# Altium PCB hotswap_pcb.PcbDoc
Units mm, origin at the board's own origin, x right, y up, seen from the top; angles counter-clockwise.
Board outline 68.71 x 34.54 mm, 4 copper layers (Top Layer 1, Logic, Bottom Layer, PWR Layer), stack 0.672 mm thick; 15 components, 13 nets, 42 pads, 6 vias.
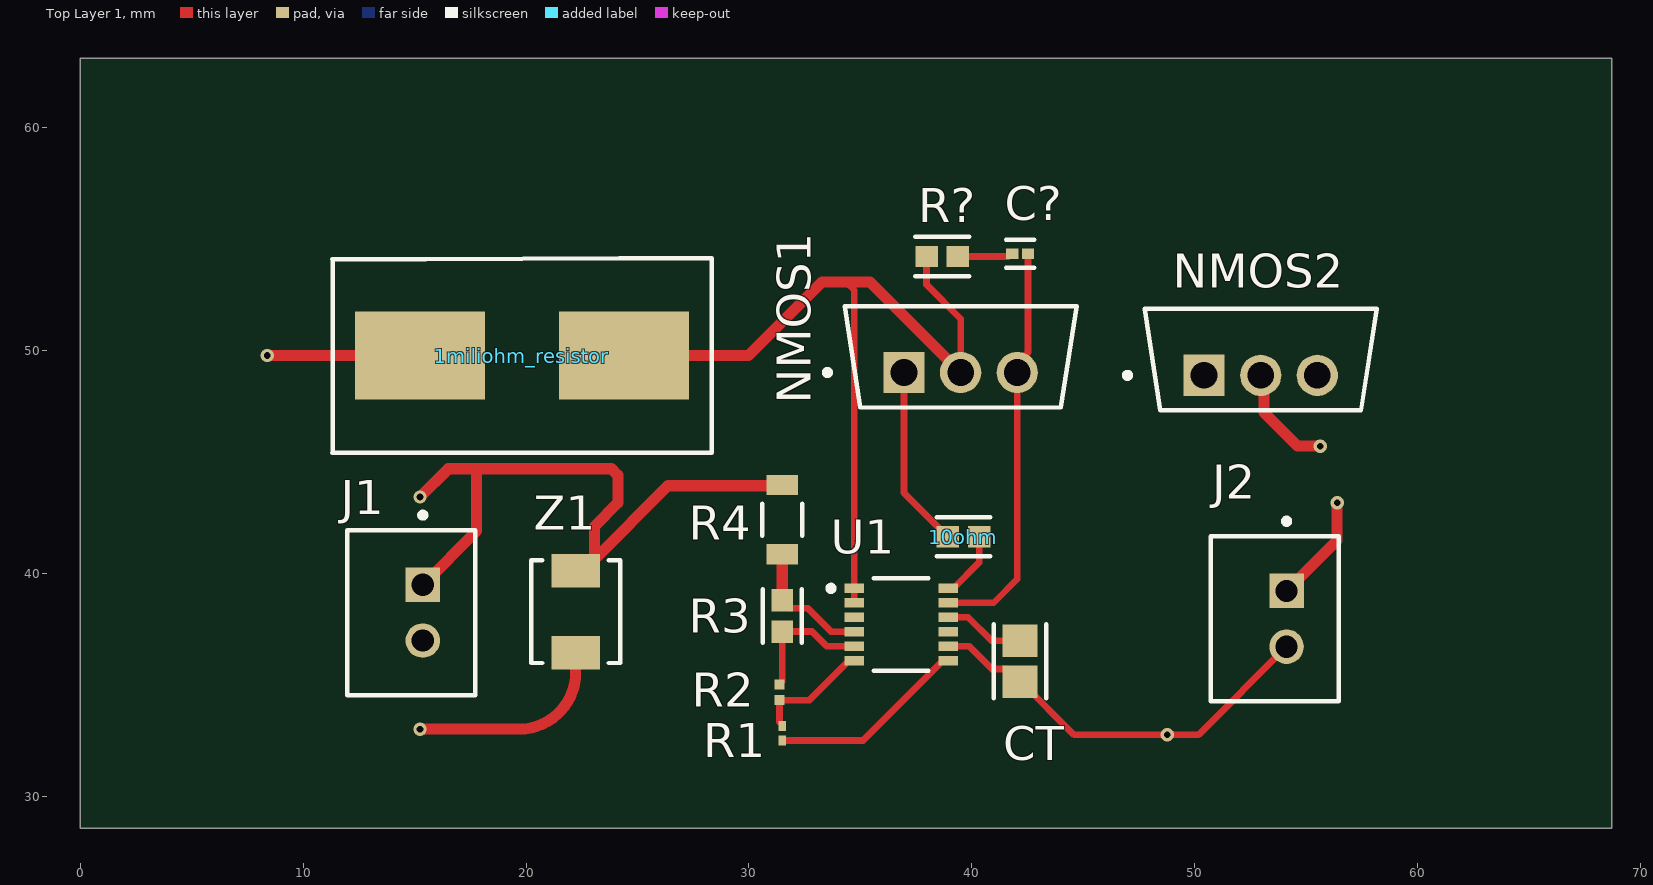
[diagram p0: Top Layer 1 view]
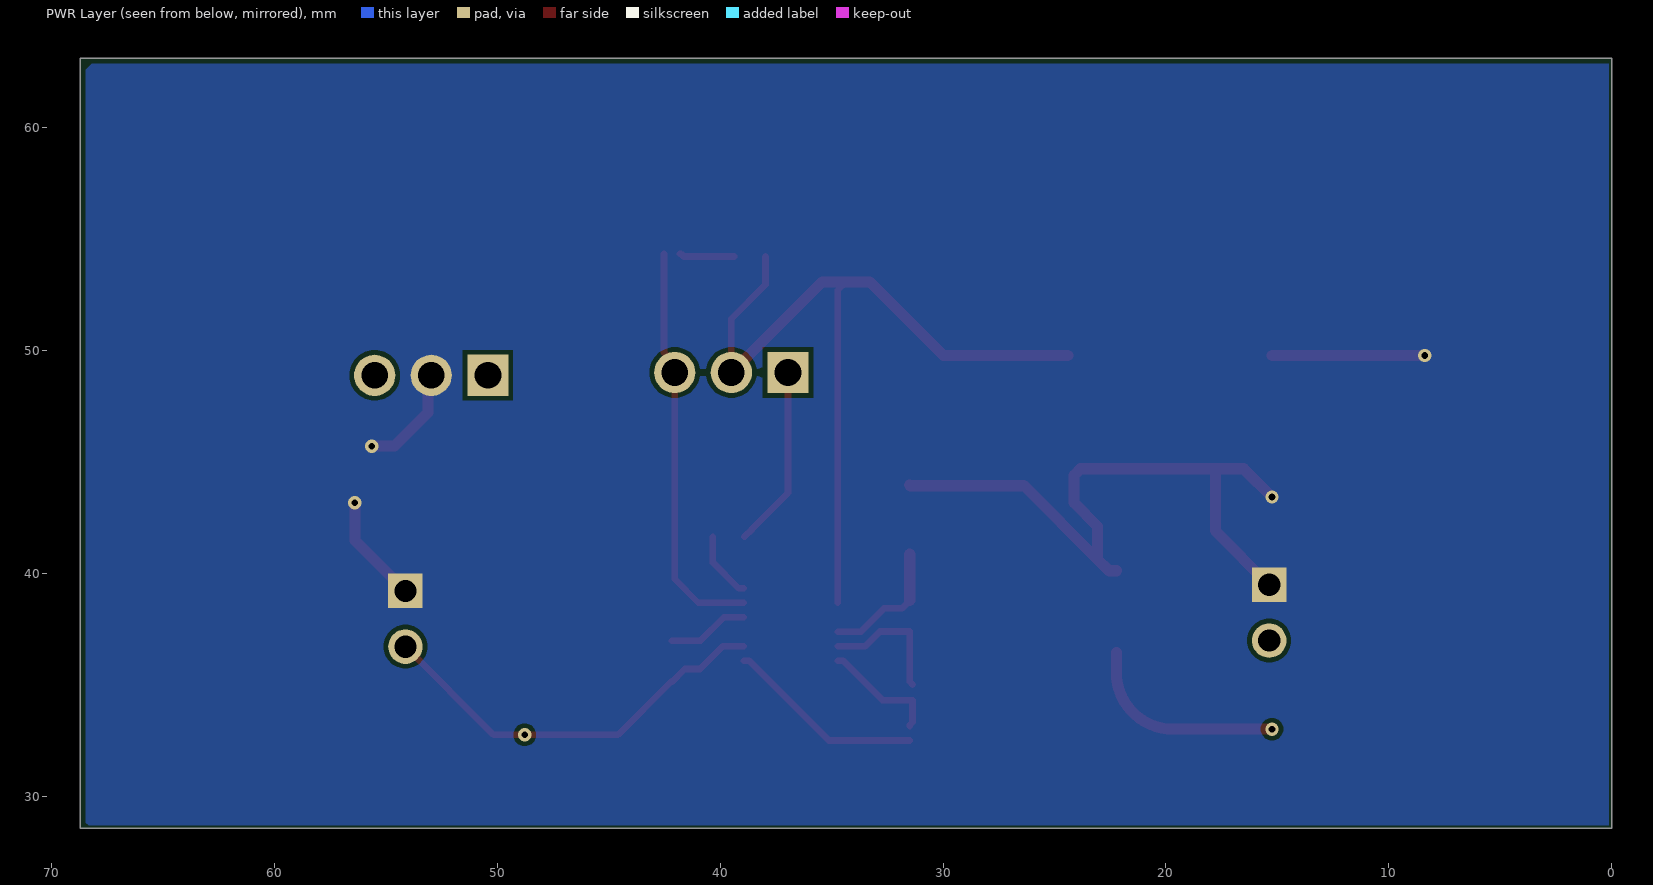
[diagram p1: PWR Layer view, seen from below]
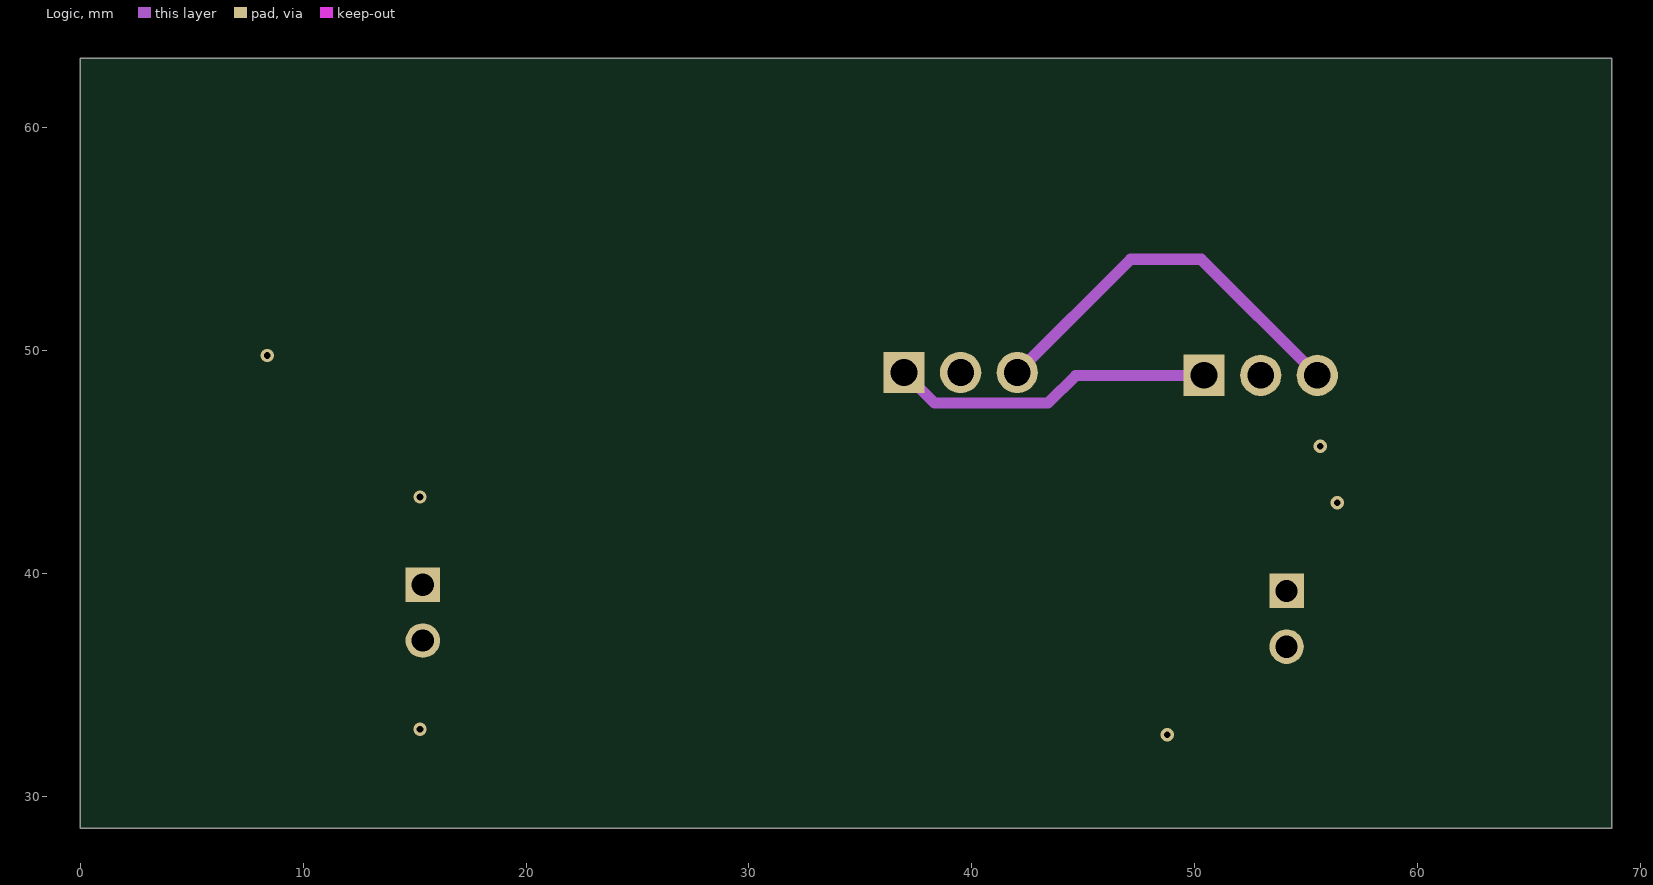
[diagram p2: Logic]
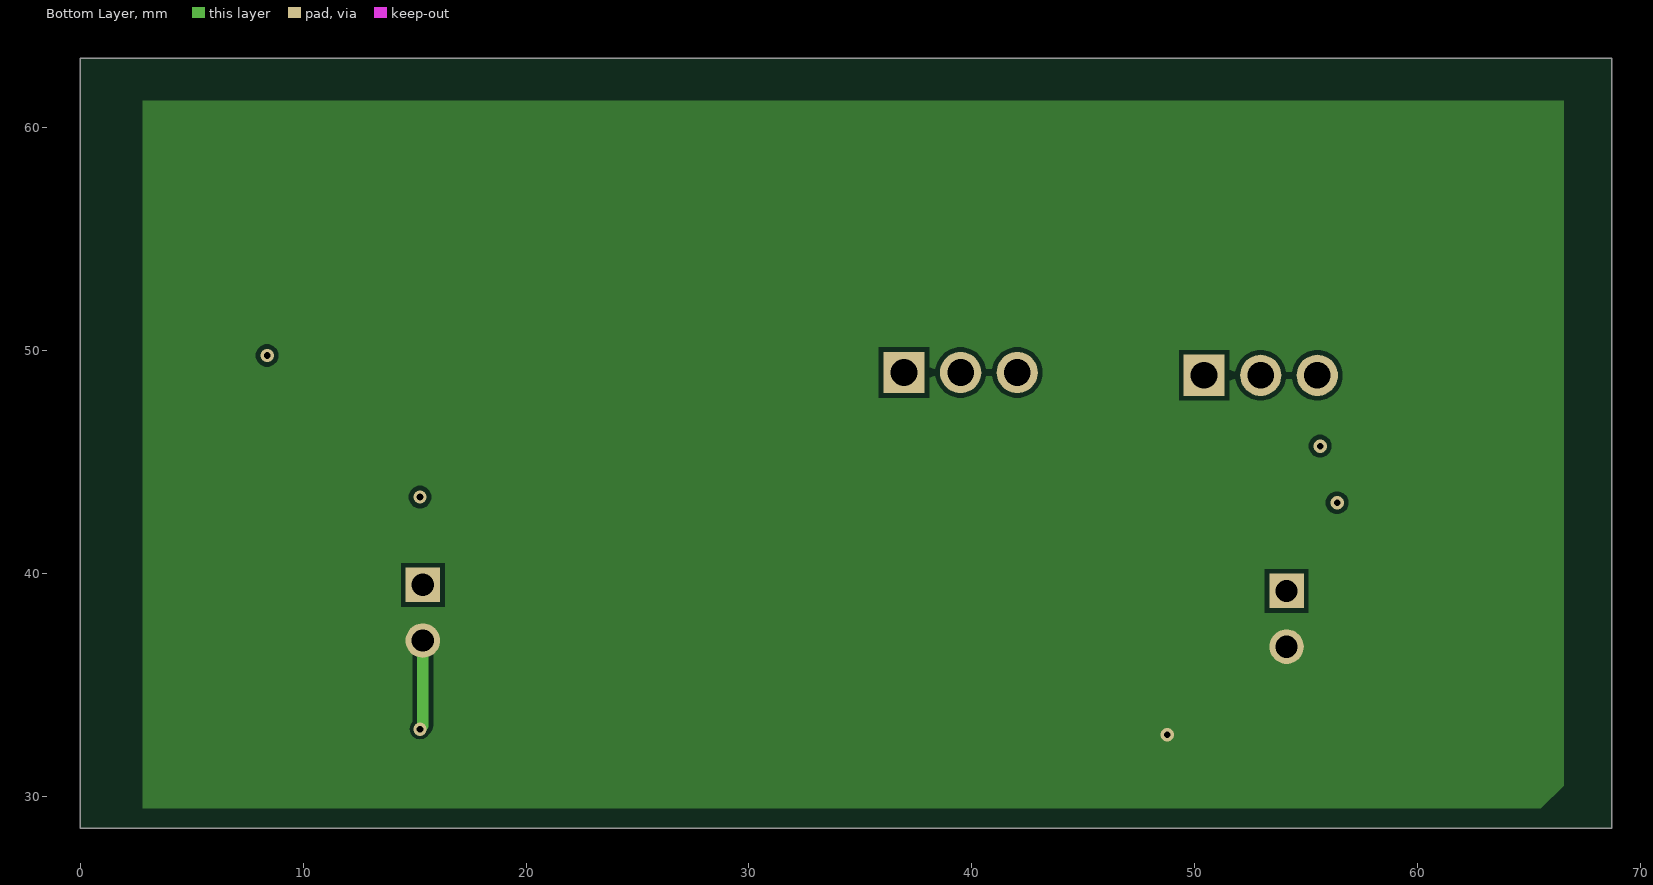
[diagram p3: Bottom Layer]
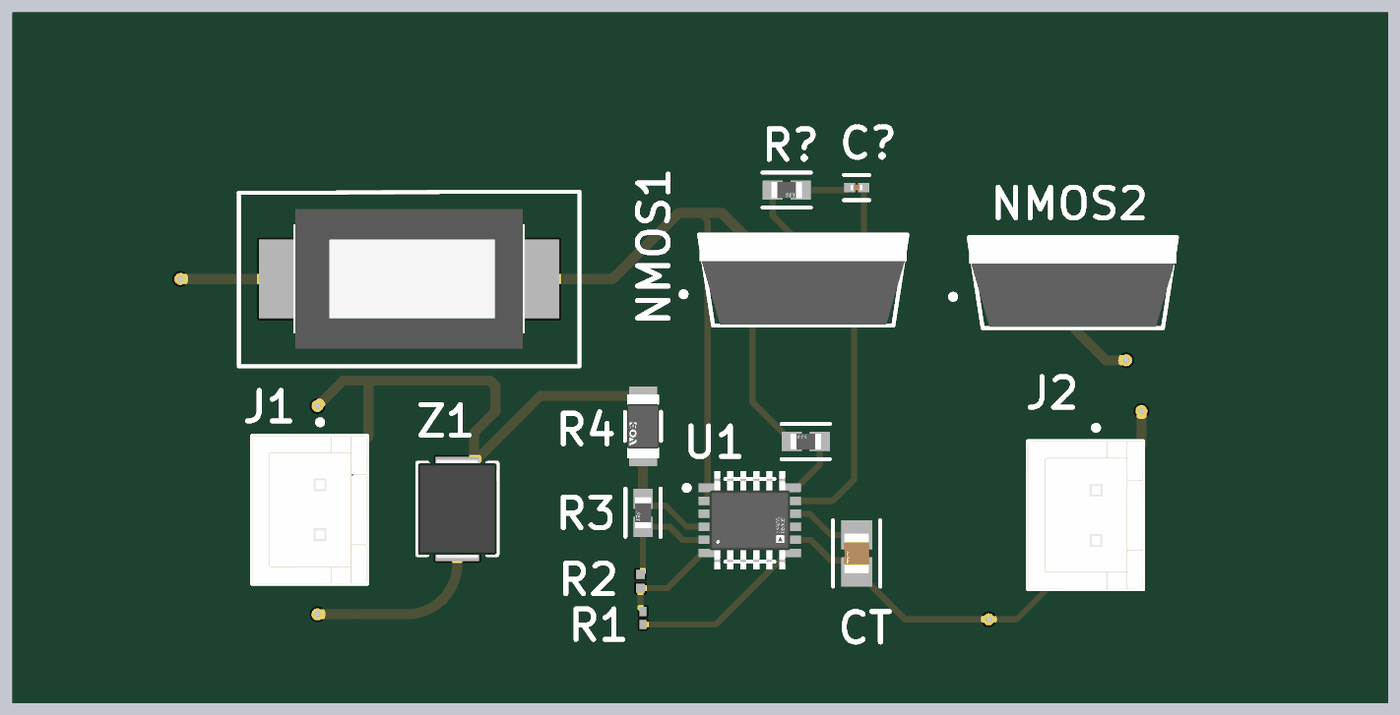
[diagram p4: 3D render of the assembled board from above, using the file's embedded part models]

## Layer stack, top to bottom
Top Solder: solder mask 0.0102, Solder Resist, Dk 3.5
Top Layer 1: signal copper 0.07
Dielectric 2: prepreg 0.0711, PP-006, Dk 4.1
Logic: signal copper 0.035
Dielectric 1: dielectric 0.32, FR-4, Dk 4.8
Bottom Layer: signal copper 0.035
Dielectric 3: prepreg 0.0711, PP-006, Dk 4.1
PWR Layer: signal copper 0.07
Bottom Solder: solder mask 0.0102, Solder Resist, Dk 3.5

## Board outline
0,28.575 68.707,28.575 68.707,63.119 0,63.119

## Design rules (kind name [scope] priority, off if disabled: settings)
Clearance [All] p1: gap=0.2 ignorepadtopadclearanceinfootprint=TRUE
HoleSize [All] p1: absolutevalues=TRUE maxlimit=10 minlimit=0.025 maxpercent=80.000 minpercent=20.000
HoleToHoleClearance [All] p1: gap=0.5 allowstackedmicrovias=TRUE
MinimumSolderMaskSliver [All] p1: minsoldermaskwidth=0.04
PolygonConnect [All] p1: connectstyle=Direct reliefconductorwidth=0.3 reliefentries=4 polygonreliefangle="90 Angle" airgapwidth=0.3
RoutingVias [All] p1: holewidth=0.3 width=0.6 viastyle="Through Hole" minholewidth=0.3 minwidth=0.6 maxholewidth=0.3 maxwidth=0.6
SilkToSolderMaskClearance [All] p1: minsilkscreentomaskgap=0.2 clearancetoexposedcopper=TRUE
SolderMaskExpansion [All] p1: expansion=0.102 istentingtop=FALSE
SupplyNets "Schematic Supply Nets_1" [InNet('+18')] p1: voltage=0.000
SupplyNets "Schematic Supply Nets" [InNet('GND')] p2: voltage=0.000
Width [All] p1: maxlimit=0.5 minlimit=0.3 preferedwidth=0.5
26 further rules are at their usual default settings.

## Components (designator, comment, footprint, x,y, rotation, side; value= is the part's Value field where it differs from the comment)
1miliohm_resistor "WSR51L000FEA" Resistor 19.812,49.784 r0 top value=1mΩ
10ohm "RMCF0603FT10R0" FP-RMCF0603-IPC_B 39.624,41.656 r180 top
C? "GRM033C71C104KE14D" FP-GRM033-0_03-IPC_A 42.164,54.356 r0 top
CT "GRM21BZ71H475ME15K" FP-GRM21B-0_2-e0_2_0_7-IPC_A 42.164,36.068 r270 top
J1 "B2B-XH-A(LF)(SN)" FP-B2B-XH-A_LF_SN-MFG 14.842,38.247 r270 top
J2 "B2B-XH-A(LF)(SN)" FP-B2B-XH-A_LF_SN-MFG 53.594,37.973 r270 top
NMOS1 "IRF2204PBF" FP-PG-TO220-3-MFG 39.497,49.727 r90 top
NMOS2 "IRF2204PBF" FP-PG-TO220-3-MFG 52.959,49.6 r90 top
R1 "910Kohm" RESC0603X26X15NL03T05 31.496,32.837 r270 top
R2 "3.48Kohm" RESC0201(0603)_N 31.369,34.671 r270 top value="3400.00 Ohm"
R3 "26.1Kohm" FP-RMCF0603-IPC_B 31.496,38.1 r270 top
R4 "39.2Kohm" FP-RN73R2B-MFG 31.496,42.418 r270 top
R? "RMCF0603FT10R0" FP-RMCF0603-IPC_B 38.669,54.229 r0 top
U1 "LTC4231IMS-1#PBF" FP-MS-12-05-08-1668-MFG 36.83,37.719 r0 top
Z1 "SMBJ24CA-E3/52" VISH-DO-214AA-A-2_V 22.225,38.289 r90 top

## Footprints (in the part's own frame and the unit in brackets; to place one, negate y for a bottom-side part, rotate by r counter-clockwise, add the part's x,y. Pads: shape width x height; smd on the part's side, far side on the other; paste and mask are expansions set on the pad)
FP-B2B-XH-A_LF_SN-MFG [mm]
  rect 1.55x1.55 hole 1 paste-2539.97 mask+0: 1(-1.25,0.525)
  round 1.55 hole 1 paste-2539.97 mask+0: 2(1.25,0.525)
  silkscreen extent -4.5,-2.88 3.7,2.88, body extent -3.8,-2.98 3.8,2.98, height 0.25
FP-GRM21B-0_2-e0_2_0_7-IPC_A [mm]
  rect 1.455x1.556 smd paste+0 mask+0: 1(-0.926,0) 2(0.926,0)
  silkscreen extent -1.65,-1.18 1.65,1.18, body extent -2.15,-1.28 2.15,1.28, height 0.25
FP-GRM033-0_03-IPC_A [mm]
  rect 0.554x0.463 smd paste+0 mask+0: 1(-0.354,0) 2(0.354,0)
  silkscreen extent -0.63,-0.63 0.63,0.63, body extent -0.83,-0.43 0.83,0.43, height 0.25
FP-MS-12-05-08-1668-MFG [mm]
  rect 0.889x0.42 smd paste+0 mask+0: 1(-2.107,1.625) 2(-2.107,0.975) 3(-2.107,0.325) 4(-2.107,-0.325) 5(-2.107,-0.975) 6(-2.107,-1.625) 7(2.107,-1.625) 8(2.107,-0.975) 9(2.107,-0.325) 10(2.107,0.325) 11(2.107,0.975) 12(2.107,1.625)
  silkscreen extent -3.27,-2.07 1.22,2.07, body extent -2.65,-2.32 2.65,2.32, height 0.25
FP-PG-TO220-3-MFG [mm]
  rect 1.85x1.85 hole 1.2 paste-2539.97 mask+0: 1(-0.705,2.54)
  round 1.85 hole 1.2 paste-2539.97 mask+0: 2(-0.705,0) 3(-0.705,-2.54)
  silkscreen extent -2.27,-5.2 2.27,6.1, body extent -2.37,-5.55 2.37,5.55, height 0.25
FP-RMCF0603-IPC_B [mm]
  rect 1.006x0.958 smd paste+0 mask+0: 1(-0.701,0) 2(0.701,0)
  silkscreen extent -1.2,-0.88 1.2,0.88, body extent -1.45,-0.73 1.45,0.73, height 0.25
FP-RN73R2B-MFG [mm]
  rect 0.9x1.4 smd paste+0 mask+0: 1(-1.55,0) 2(1.55,0)
  silkscreen extent -0.72,-0.9 0.72,0.9, body extent -2.1,-1 2.1,1, height 0.25
RESC0201(0603)_N [mm] "Chip Resistor, Body 0.6x0.3mm, IPC Medium Density"
  rect 0.45x0.45 smd: 1(-0.35,0) 2(0.35,0)
  body extent -0.31,-0.16 0.31,0.16, height 0.3
RESC0603X26X15NL03T05 [mm] "Chip Resistor, 2-Leads, Body 0.60x0.30mm, IPC Medium Density"
  rect 0.45x0.35 smd: 1(-0.325,0) 2(0.325,0)
  body extent -0.32,-0.16 0.32,0.17, height 0.26
Resistor [mm]
  rect 5.84x3.94 smd: 1(-4.575,0) 2(4.575,0)
  silkscreen extent -8.51,-4.37 8.51,4.37, body extent -5.78,-3.49 5.78,3.49, height 2.43
VISH-DO-214AA-A-2_V [mm] "Molded Diode, 2-Leads, Body 4.57x3.94mm"
  rect 1.52x2.18 smd: 1(-1.84,0) 2(1.839,0)
  silkscreen extent -2.3,-2 2.3,2, body extent -2.5,-1.97 2.5,1.97, height 2.44

## Part data
1miliohm_resistor: "Fixed Resistor, Metal Strip, 5W, 0.001ohm, 0.07V, 1% +/-Tol, 750ppm/Cel, Surface Mount, 4527", Case Code (Imperial)=4527, Manufacturer=Vishay, Max Operating Temperature=275°C, Max Power Dissipation=5W, Min Operating Temperature=-65°C, Supplier Part Number=WSRC-.001CT-ND, Temperature Coefficient=750ppm/°C, Tolerance=1%, Working Voltage=70mV, Case/Package=4527, Category="Chip SMD Resistors", China RoHS=Compliant, ComponentLink1Description=https://datasheet.octopart.com:443/WSR51L000FEA-Vishay-datasheet-151891905.pdf?src-supplier=IHS, ComponentLink1URL=https://datasheet.octopart.com:443/WSR51L000FEA-Vishay-datasheet-151891905.pdf?src-supplier=IHS, ComponentLink2Description=https://datasheet.octopart.com:443/WSR51L000FEA-Vishay-datasheet-104525432.pdf?src-supplier=Future+Electronics, ComponentLink2URL=https://datasheet.octopart.com:443/WSR51L000FEA-Vishay-datasheet-104525432.pdf?src-supplier=Future+Electronics, ComponentLink3Description=https://datasheet.octopart.com:443/WSR51L000FEA-Vishay-datasheet-12538435.pdf?src-supplier=Factory+Futures, ComponentLink3URL=https://datasheet.octopart.com:443/WSR51L000FEA-Vishay-datasheet-12538435.pdf?src-supplier=Factory+Futures, ComponentLink4Description=https://datasheet.octopart.com:443/WSR51L000FEA-Vishay-datasheet-12525249.pdf?src-supplier=Factory+Futures, ComponentLink4URL=https://datasheet.octopart.com:443/WSR51L000FEA-Vishay-datasheet-12525249.pdf?src-supplier=Factory+Futures, ComponentLink5Description=https://datasheet.octopart.com:443/WSR51L000FEA-Vishay-datasheet-12509929.pdf?src-supplier=Factory+Futures, ComponentLink5URL=https://datasheet.octopart.com:443/WSR51L000FEA-Vishay-datasheet-12509929.pdf?src-supplier=Factory+Futures, ComponentLink6Description=https://datasheet.octopart.com:443/WSR51L000FEA-Vishay-datasheet-8877212.pdf?src-supplier=Factory+Futures, ComponentLink6URL=https://datasheet.octopart.com:443/WSR51L000FEA-Vishay-datasheet-8877212.pdf?src-supplier=Factory+Futures, ComponentLink7Description=https://datasheet.octopart.com:443/WSR51L000FEA-Vishay-datasheet-8374044.pdf?src-supplier=Factory+Futures, ComponentLink7URL=https://datasheet.octopart.com:443/WSR51L000FEA-Vishay-datasheet-8374044.pdf?src-supplier=Factory+Futures, ComponentLink8Description=https://datasheet.octopart.com:443/WSR51L000FEA-Vishay-datasheet-5320589.pdf?src-supplier=Factory+Futures, ComponentLink8URL=https://datasheet.octopart.com:443/WSR51L000FEA-Vishay-datasheet-5320589.pdf?src-supplier=Factory+Futures, ComponentLink9Description=http://sigma.octopart.com:80/rohs_statement/Vishay-company-15.pdf?src-supplier=Compliance+Statements, ComponentLink9URL=http://sigma.octopart.com:80/rohs_statement/Vishay-company-15.pdf?src-supplier=Compliance+Statements, Composition="Metal Element, Metal Strip", Contact Plating="Silver, Tin", Features="Automotive AEC-Q200, Moisture Resistant", Height=2.41mm, Length=11.557mm, Lifecycle Status=Production, Manufacturer Part Number=WSR51L000FEA, Mounting Technology="Surface Mount", Number of Terminals=2, Number of Terminations=2, Power Dissipation=5W, Power Rating=5W, Pricing="1=3.5, 10=2.354, 25=2.042, 50=1.8464, 100=1.6803, 250=1.49828, 500=1.38442 (USD)", Radiation Hardening=No, REACH SVHC=Yes, RoHS=Compliant, Stock=2101, Supplier=DigiKey, Termination=SMD/SMT, Width=6.98mm
10ohm R?: library part CMP-26527-005040-1, "10Ω ±1% 0.1W 0603 Thick Film Chip Resistor AEC-Q200 compliant", Case Code (Imperial)=0603, Case Code (Metric)=1608, Max Operating Temperature=155°C, Max Power Dissipation=100mW, Min Operating Temperature=-55°C, Resistance=10R, Resistor Type="Thick Film", Temperature Coefficient=100ppm/°C, Tolerance=1%, Case/Package=0603, Construction=Rectangular, Contact Plating=Tin, Depth=0.8mm, Features="Automotive AEC-Q200", Height=0.022inch, Length=1.55mm, Military Standard=Not, Mount="Surface Mount", Number of Terminations=2, Packaging="Tape and Reel", Power Rating=100mW, Radiation Hardening=No, RoHS Compliant=Yes, Series=RMCF, Width=0.031inch
C?: library part CMP-06035-019037-1, "Chip Multilayer Ceramic Capacitors for General Purpose, 0201, 0.10uF, X7S, 22%, 10%, 16V", Capacitance=100nF, Case Code (Imperial)=0201, Case Code (Metric)=0603, Dielectric=X7S, Max Operating Temperature=125°C, Min Operating Temperature=-55°C, Package Quantity=15000, Tolerance=10%, Voltage Rating=16V, Case/Package=0201, Height=0.3mm, Length=0.024inch, Mount="Surface Mount", Packaging="Tape and Reel", Termination=SMD/SMT, Thickness=0.013inch, Voltage Rating (DC)=16V, Weight=1.2E-05oz, Width=0.3mm
CT: library part CMP-06035-012295-1, "Chip Multilayer Ceramic Capacitors for General Purpose, 0805, 4.7uF, X7R, 15%, 20%, 50V"
J1 J2: library part CMP-2000-05888-3, "CONN HEADER VERT 2POS 2.5MM", Color=Natural, Contact Resistance=20mR, Current Rating=3A, Housing Color=White, Insulation Resistance=1GR, Max Operating Temperature=85°C, Max Voltage Rating (AC)=250V, Min Operating Temperature=-25°C, Connector Type="Male Pin", Contact Material=Brass, Contact Plating=Tin, Contact Type="Male Pin", Depth=5.75mm, Fastening Type=Detent, Housing Material=Polyamide, Lead Free="Lead Free", Lead Pitch=2.5mm, Length=7.4mm, Max Current Rating=3A, Max Voltage Rating (DC)=250V, Mount="Through Hole", Number of Contacts=2, Number of Positions=2, Number of Rows=1, Orientation=Straight, Packaging=Bulk, Pitch=2.5mm, REACH SVHC="No SVHC", Series=XH, Termination=Solder, Voltage Rating=250V, Voltage Rating (AC)=250V, Wire/Cable Gauge=22AWG
NMOS1 NMOS2: library part CMP-00196-65873303-1, "IRF2204PBF Mosfet, Power; N-ch; Vdss 40V; Rds(on) 3 Milliohms; Id 210A; TO-220AB; Pd 330W; Vf 1.3V", Case/Package=TO-220AB, Continuous Drain Current (ID)=210A, Drain to Source Breakdown Voltage=40V, Drain to Source Resistance=3mΩ, Gate to Source Voltage (Vgs)=20V, Input Capacitance=5.89nF, Max Junction Temperature (Tj)=175°C, Max Power Dissipation=330W, Min Operating Temperature=-55°C, On-State Resistance=3.6mΩ, Package Quantity=1000, Resistance=3.6Ω, Threshold Voltage=4V, Contact Plating=Tin, Current Rating=210A, Drain to Source Voltage (Vdss)=40V, Dual Supply Voltage=40V, Element Configuration=Single, Fall Time=110ns, Height=16.51mm, Lead Free="Lead Free", Length=10.668mm, Lifecycle Status=Production, Max Operating Temperature=175°C, Mount="Through Hole", NexarPartId=65873303, Nominal Vgs=4V, Number of Channels=1, Number of Elements=1, Number of Pins=3, Packaging=Bulk, Power Dissipation=330W, Radiation Hardening=No, Rds On Max=3.6mΩ, REACH SVHC="No SVHC", Rise Time=140ns, RoHS=Compliant, Schedule B="8541290080, 8541290080|8541290080|8541290080|8541290080|8541290080", Turn-Off Delay Time=62ns, Turn-On Delay Time=15ns, Voltage Rating (DC)=40V, Width=4.826mm
R1: library part CMP-2004-03436-1, Manufacturer=Panasonic, Part Number=ERJ-1GNF9311C
R2: library part CMP-1010-00475-1, "3K4 0.05W 1% 0201 (0603 Metric)  SMD", Case-EIA=0201, Case-Metric=0603, Power="0.05 W", Tolerance="1 %", Technology=SMT
R3: library part CMP-26527-006949-1, "26.1kΩ ±1% 0.1W 0603 Thick Film Chip Resistor AEC-Q200 compliant", Case Code (Imperial)=0603, Case Code (Metric)=1608, Max Operating Temperature=155°C, Max Power Dissipation=100mW, Min Operating Temperature=-55°C, Resistance=26.1kR, Resistor Type="Thick Film", Temperature Coefficient=100ppm/°C, Tolerance=1%, Case/Package=0603, Contact Plating=Tin, Features="Automotive AEC-Q200", Height=0.022inch, Length=0.061inch, Mount="Surface Mount", Number of Terminations=2, Packaging="Tape and Reel", Radiation Hardening=No, RoHS Compliant=Yes, Series=RMCF, Width=0.031inch
R4: library part CMP-04015-063809-1, "39.7kΩ ±1% 0.25W, 1/4W Chip Resistor 1206 (3216 Metric) Moisture Resistant Thin Film"
U1: library part CMP-09134-000018-1, "IC HOT SWAP CTRLR GP 12MSOP", Case/Package=MSOP, Max Operating Temperature=85°C, Max Supply Voltage=36V, Min Operating Temperature=-40°C, Min Supply Voltage=2.7V, Operating Supply Current=4uA, Features="Latched Fault", Mount="Surface Mount", Number of Channels=1, Number of Pins=12, Packaging=Rail/Tube, REACH SVHC="No SVHC", RoHS Compliant=Yes
Z1: library part CMP-2000-07094-1, "TRANSZORB(R) Transient Voltage Suppressor, 24 V, -55 to 150 degC, 2-Pin DO-214AA (SMBJ), RoHS, Tape and Reel", Breakdown Voltage Max=29.5V, Breakdown Voltage Min=26.7V, Clamping Voltage Vc Max=38.9V, Diode Case Style=DO-214AA, Manufacturer=Vishay, Package Description="2-Pin Surface Mount Device, Body 4.315 x 3.62 mm", Peak Pulse Current Ippm=14A, Peak Pulse Power Dissipation=600W, Reverse Stand-Off Voltage Vrwm=24V, Datasheet URL=http://www.vishay.com/docs/88392/smbj50a.pdf, Datasheet Version=02/2014, Manufacturer URL=http://www.vishay.com/, Mounting Technology=SurfaceMount, No. of Pins=2Pins, Package Reference=DO-214AA, Packaging=CutTape, Power Dissipation Pd=600W, Product Range=TRANSZORBSMBJSeries, SVHC=ToBeAdvised, TVS Polarity=Bidirectional

## Via types
v1: diameter 0.6, hole 0.3, Top Layer 1 to PWR Layer, 6 vias

## Nets (pads, with @x,y where several pads share a name; then routed paths per layer and width w, separated by ;. In a path a pad name is that pad's centre, name@x,y a point inside that pad or via, vN(x,y) a via of type N, cw(c..) or ccw(c..) an arc to the next point about the centre after c; other vN are vias at no path point)
+18: 1miliohm_resistor.1 J1.1 J2.1 NMOS2.2 R4.1 Z1.2 | length 47.4
  Top Layer 1 w0.5: v1(8.382,49.784) 1miliohm_resistor.1 ; v1(15.24,43.434) 16.51,44.704 17.78,44.704 ; J1.1 17.78,41.91 17.78,44.704 ; Z1.2 22.555,40.128 Z1.2@23.065,40.638 ; R4.1 31.47,43.942 26.369,43.942 Z1.2@23.065,40.638 ; NMOS2.2 53.11,48.744 53.11,47.22 54.61,45.72 v1(55.626,45.72) ; J2.1 56.388,41.492 v1(56.388,43.18) ; 17.78,44.704 23.837,44.704 24.13,44.411 24.13,43.18 23.065,42.115 Z1.2@23.065,40.638
GND: CT.2 J1.2 J2.2 U1.8 Z1.1 | length 31.8
  Top Layer 1 w0.3: U1.8 39.871,36.744 40.896,35.72 41.587,35.72 CT.2 42.215,35.142 44.591,32.766 v1(48.768,32.766) 50.162,32.766 J2.2
  Top Layer 1 w0.5: v1(15.24,33.02) 19.685,33.02 ccw(c19.685,35.56) 22.225,35.56 Z1.1
  Bottom Layer w0.5: v1(15.24,33.02) 15.24,33.047 15.367,33.174 J1.2
Net1miliohm_resistor_2: 1miliohm_resistor.2 NMOS1.2 R?.1 U1.1 U1.2 | length 38.5
  Top Layer 1 w0.3: 34.353,53.086 34.723,52.717 U1.1 U1.2 ; R?.1 37.968,52.964 39.497,51.435 NMOS1.2
  Top Layer 1 w0.5: 1miliohm_resistor.2 29.972,49.784 33.274,53.086 34.353,53.086 35.433,53.086 NMOS1.2
Net10ohm_1: 10ohm.1 U1.12 | length 3
  Top Layer 1 w0.3: U1.12 39.172,39.344 40.325,40.498 10ohm.1
Net10ohm_2: 10ohm.2 NMOS1.1 NMOS2.1 | length 22.7
  Top Layer 1 w0.3: NMOS1.1 36.957,43.622 38.57,42.009 38.57,41.985 38.899,41.656 10ohm.2
  Logic w0.5: NMOS1.1 38.332,47.647 43.414,47.647 44.662,48.895 NMOS2.1
NetC?_1: C?.1 R?.2 | length 2.5
  Top Layer 1 w0.3: R?.2 41.637,54.229 41.764,54.356 C?.1
NetC?_2: C?.2 NMOS1.3 NMOS2.3 U1.11 | length 36.1
  Top Layer 1 w0.3: U1.11 40.98,38.694 42.037,39.751 NMOS1.3 42.037,49.441 42.518,49.923 C?.2
  Logic w0.5: NMOS1.3 47.117,54.102 50.292,54.102 NMOS2.3
NetCT_1: CT.1 U1.10 | length 3.7
  Top Layer 1 w0.3: U1.10 38.94,38.041 39.832,38.041 40.879,36.994 CT.1
NetJ2_1: 
NetR1_1: R1.1 R2.2 U1.6 | length 5.3
  Top Layer 1 w0.3: R1.1 31.496,33.212 31.369,33.339 R2.2 32.715,34.321 34.488,36.094 U1.6
NetR1_2: R1.2 U1.7 | length 8.9
  Top Layer 1 w0.3: R1.2 35.121,32.512 38.703,36.094 U1.7
NetR2_1: R2.1 R3.2 U1.5 | length 5.9
  Top Layer 1 w0.3: R2.1 31.496,35.148 R3.2 32.829,37.399 33.484,36.744 U1.5
NetR3_1: R3.1 R4.2 U1.4 | length 5.9
  Top Layer 1 w0.3: R3.1 31.496,38.777 31.825,38.448 32.63,38.448 33.684,37.394 U1.4
  Top Layer 1 w0.5: R3.1 R4.2
pads on no net: U1.3 U1.9

## Polygon pours and split planes (outlines as drawn)
+18 on PWR Layer "PWR" (solid, pour order 0): 0.127,62.865 68.199,62.865 68.453,62.611 68.453,28.829 68.326,28.702 0.127,28.702
GND on Bottom Layer "GND" (solid, pour order 3): 2.54,61.214 66.548,61.214 66.548,30.48 65.532,29.464 2.794,29.464 2.794,61.214 2.54,61.468